# Altium PCB Relay_Mux_test.PcbDoc
Units mil, origin at the board's own origin, x right, y up, seen from the top; angles counter-clockwise.
Board outline 4325 x 2830 mil, 4 copper layers (Component Side, Ground Plane, Power Plane, Solder Side), stack 33.234 mil thick; 61 components, 93 nets, 292 pads, 8 vias.
Unrouted connection lines stored in the file: 98.
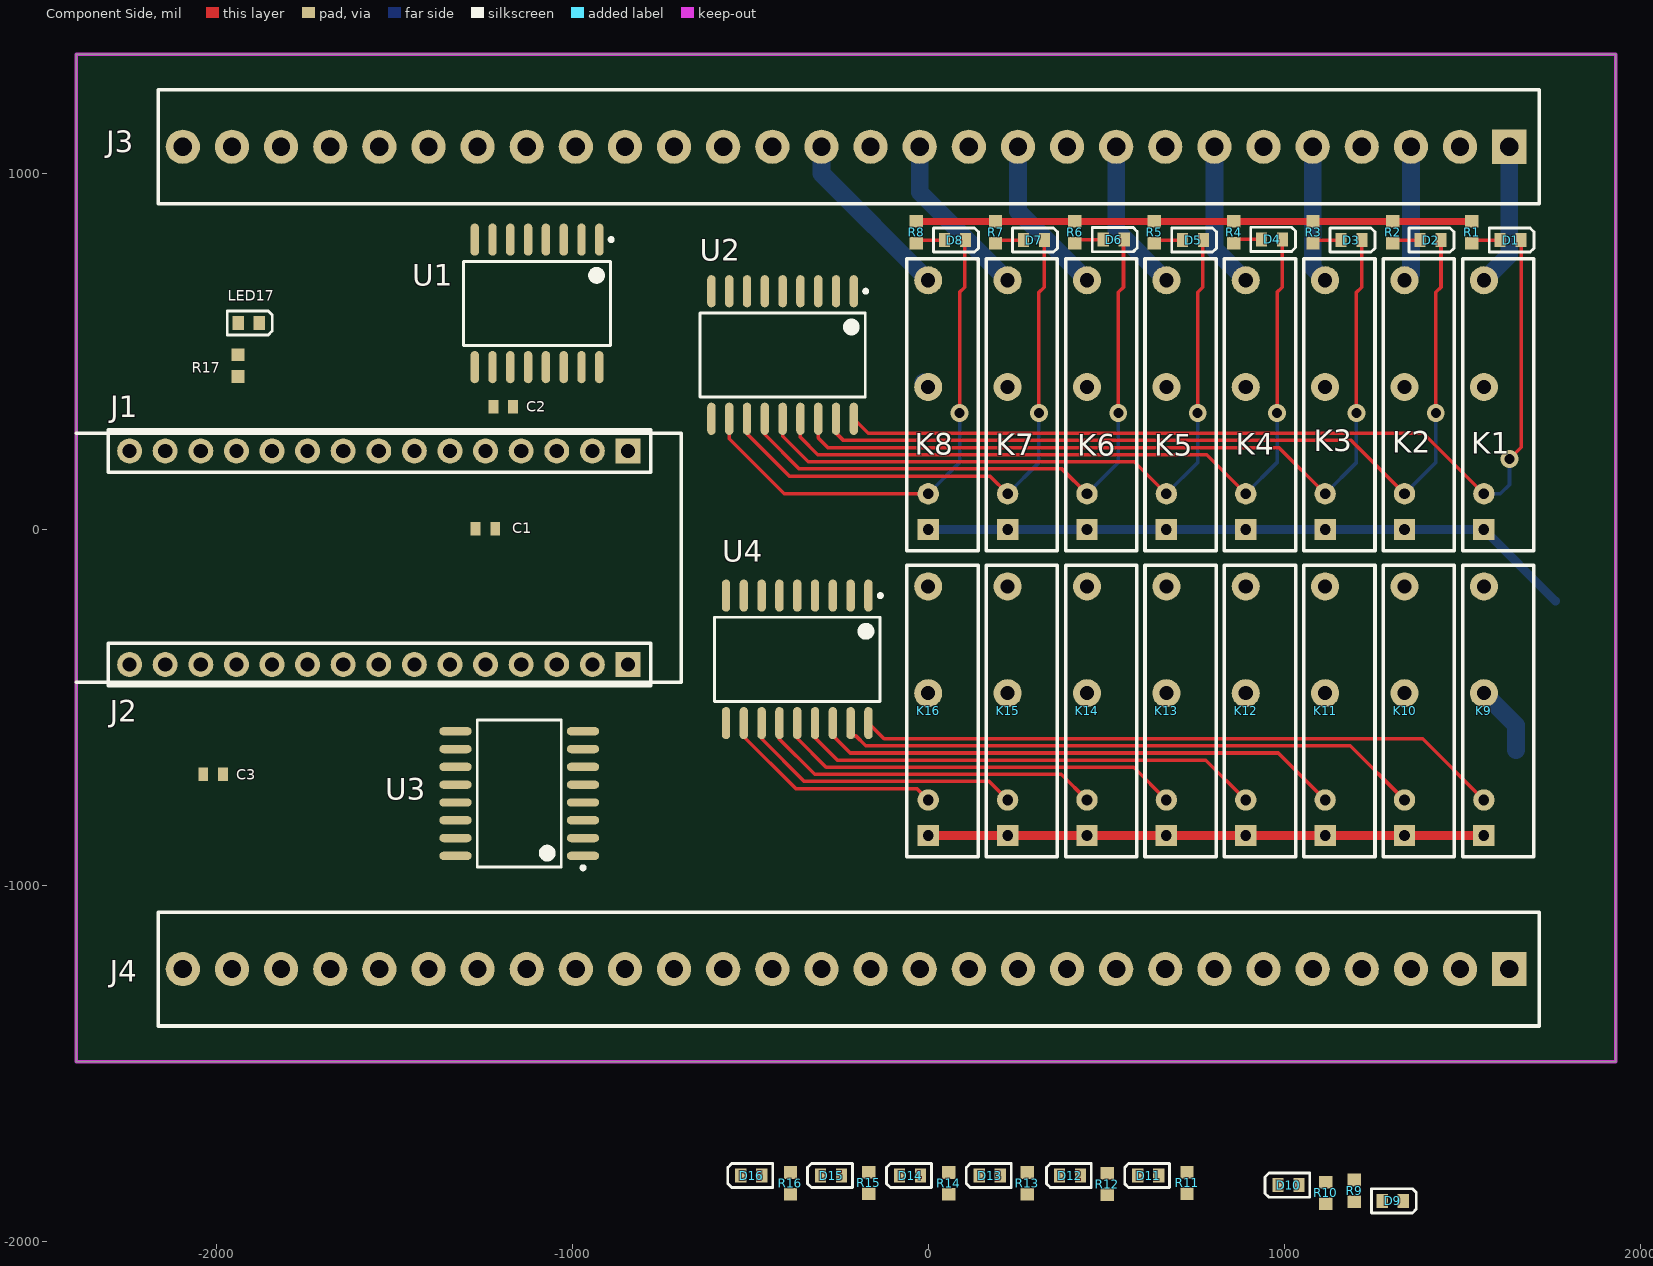
[diagram p0: Component Side view]
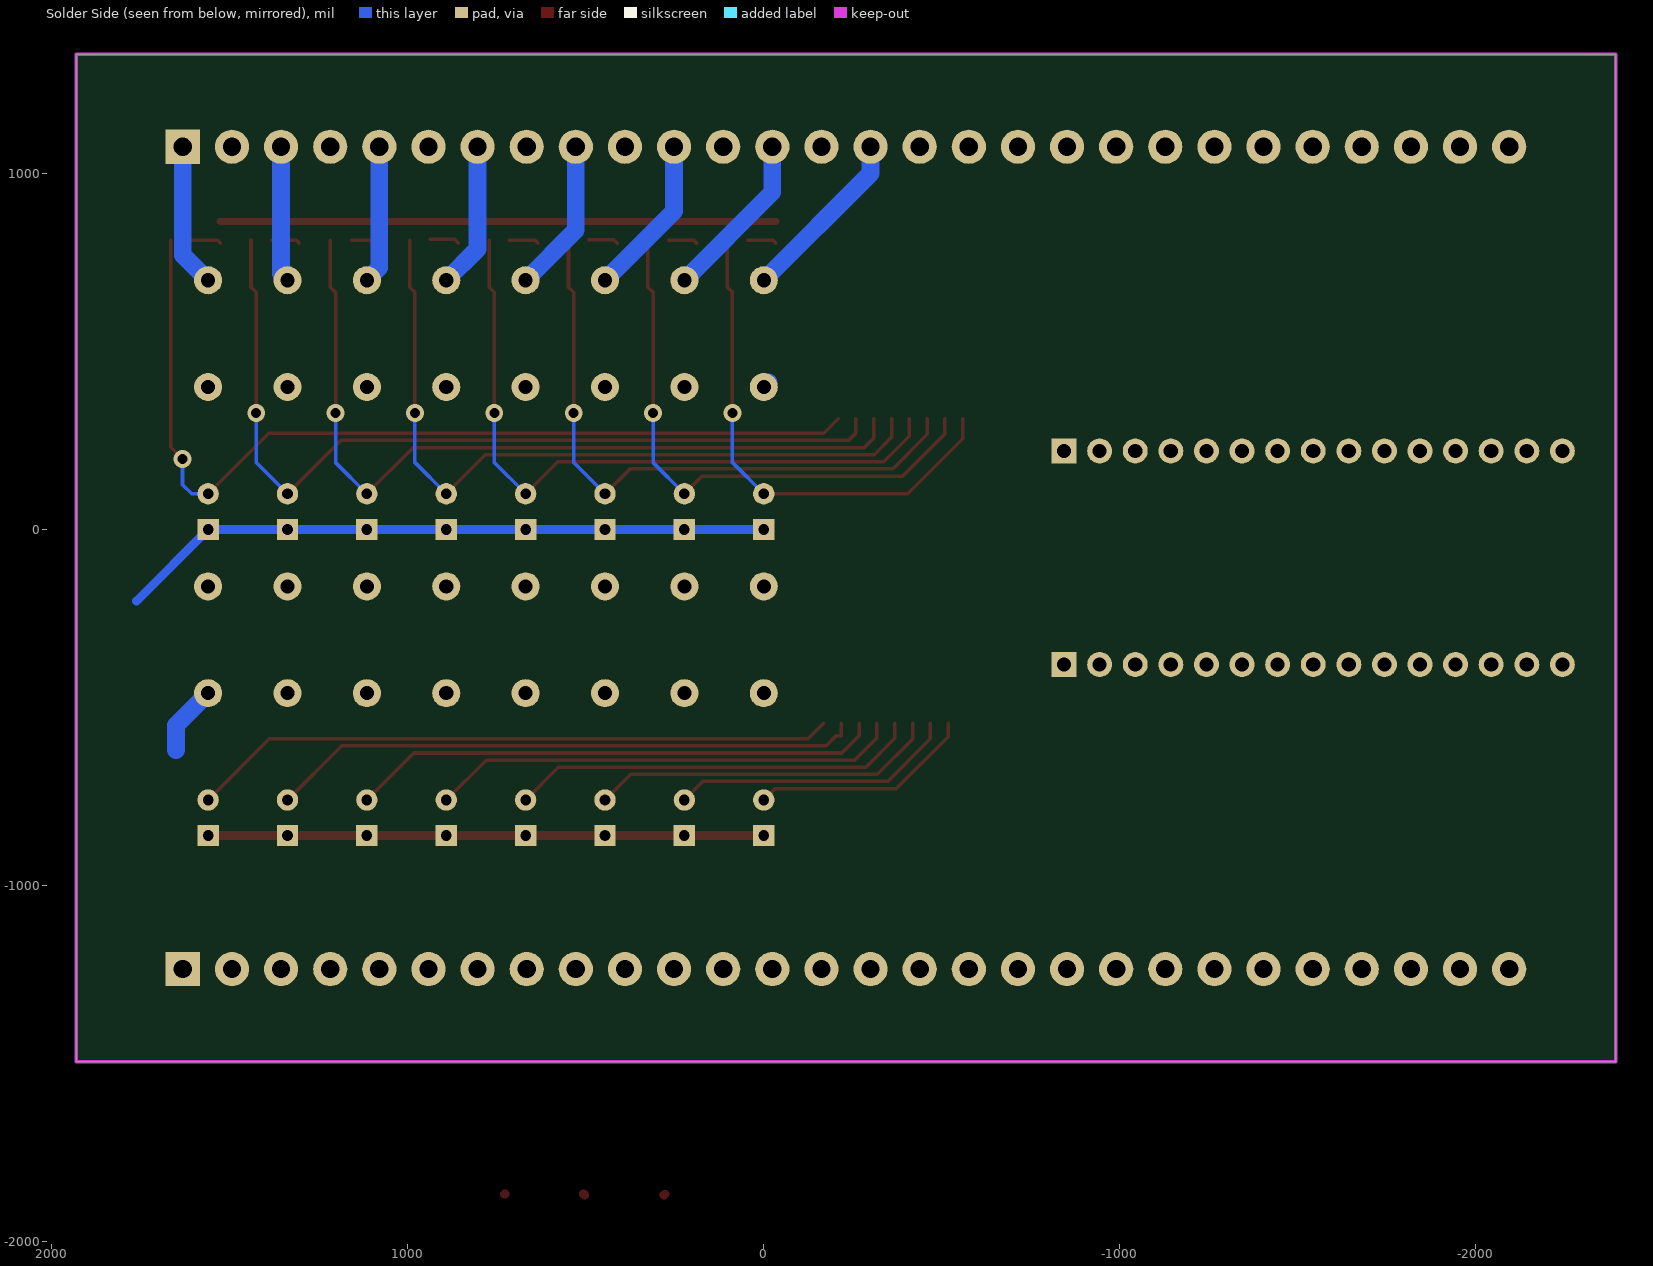
[diagram p1: Solder Side view, seen from below]
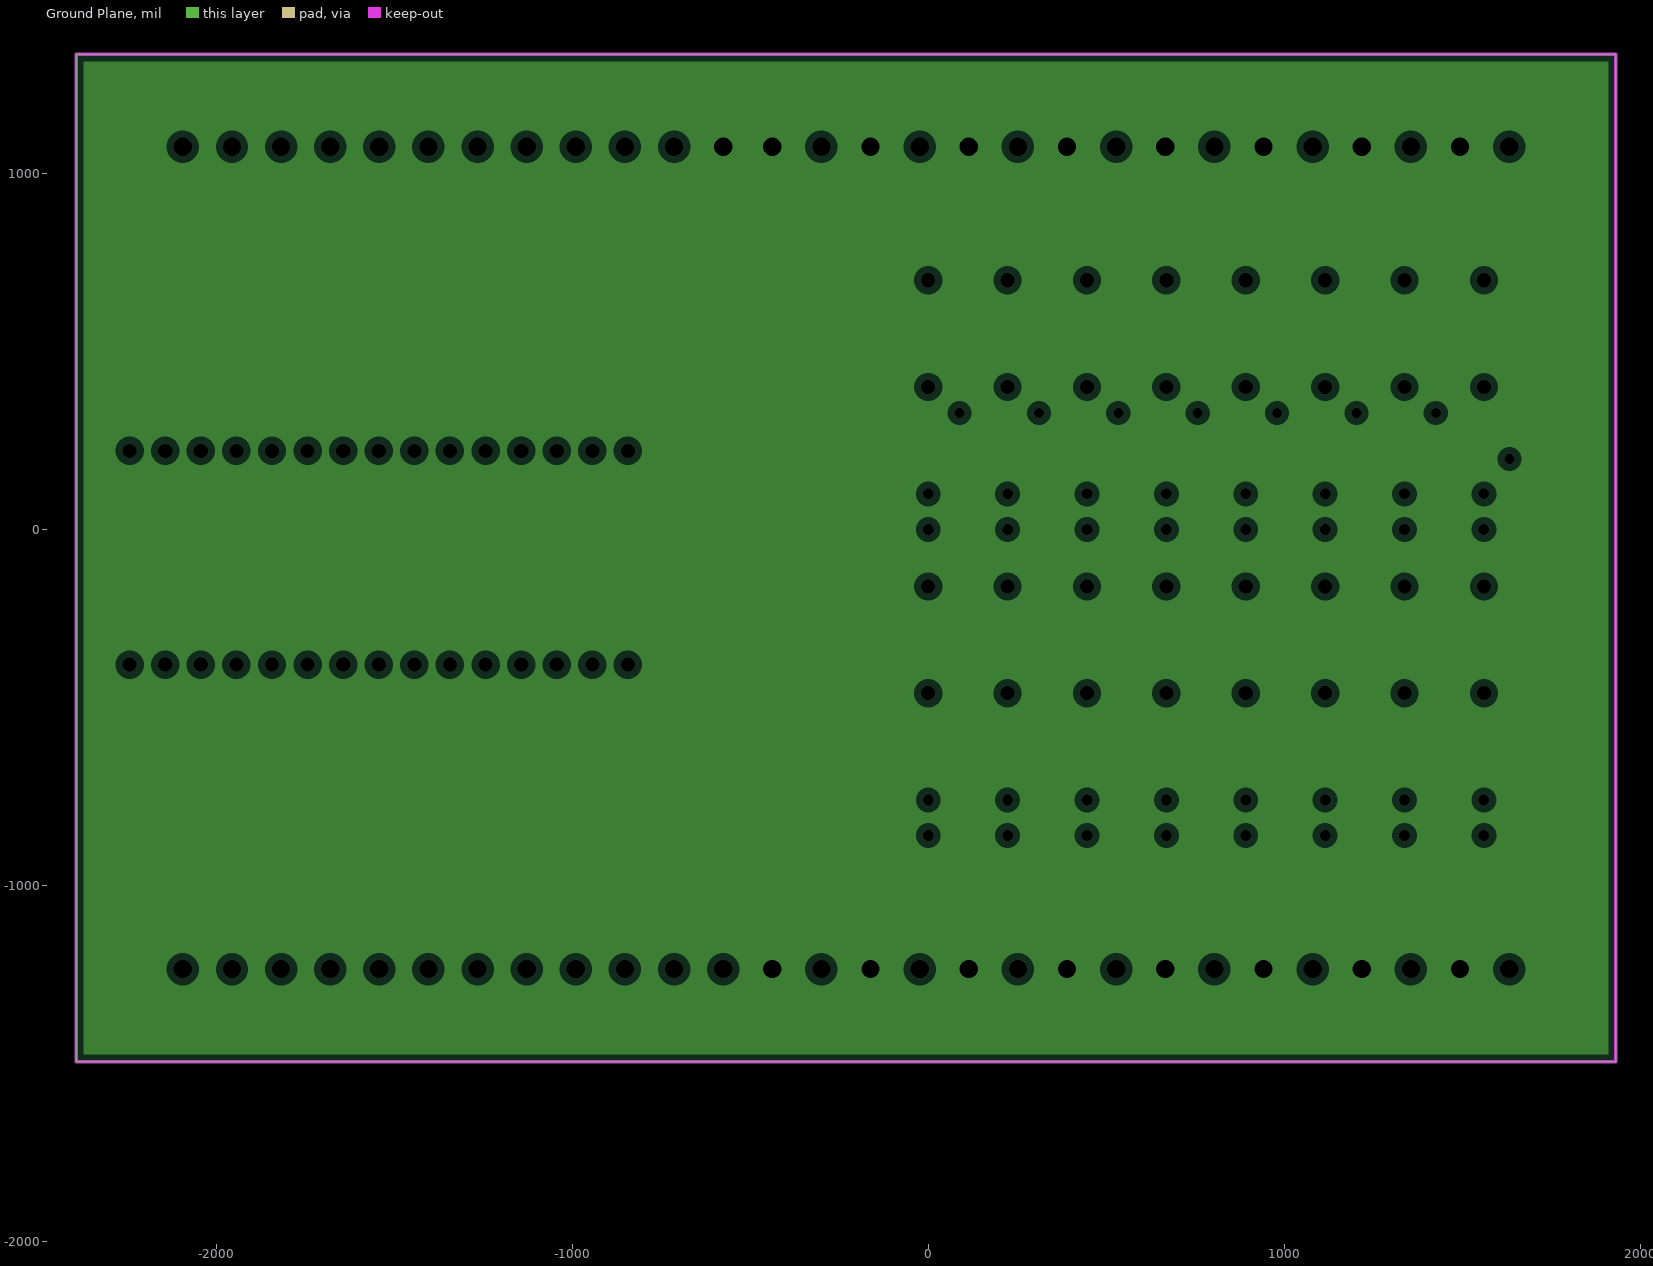
[diagram p2: Ground Plane, clearances drawn from the general rule]
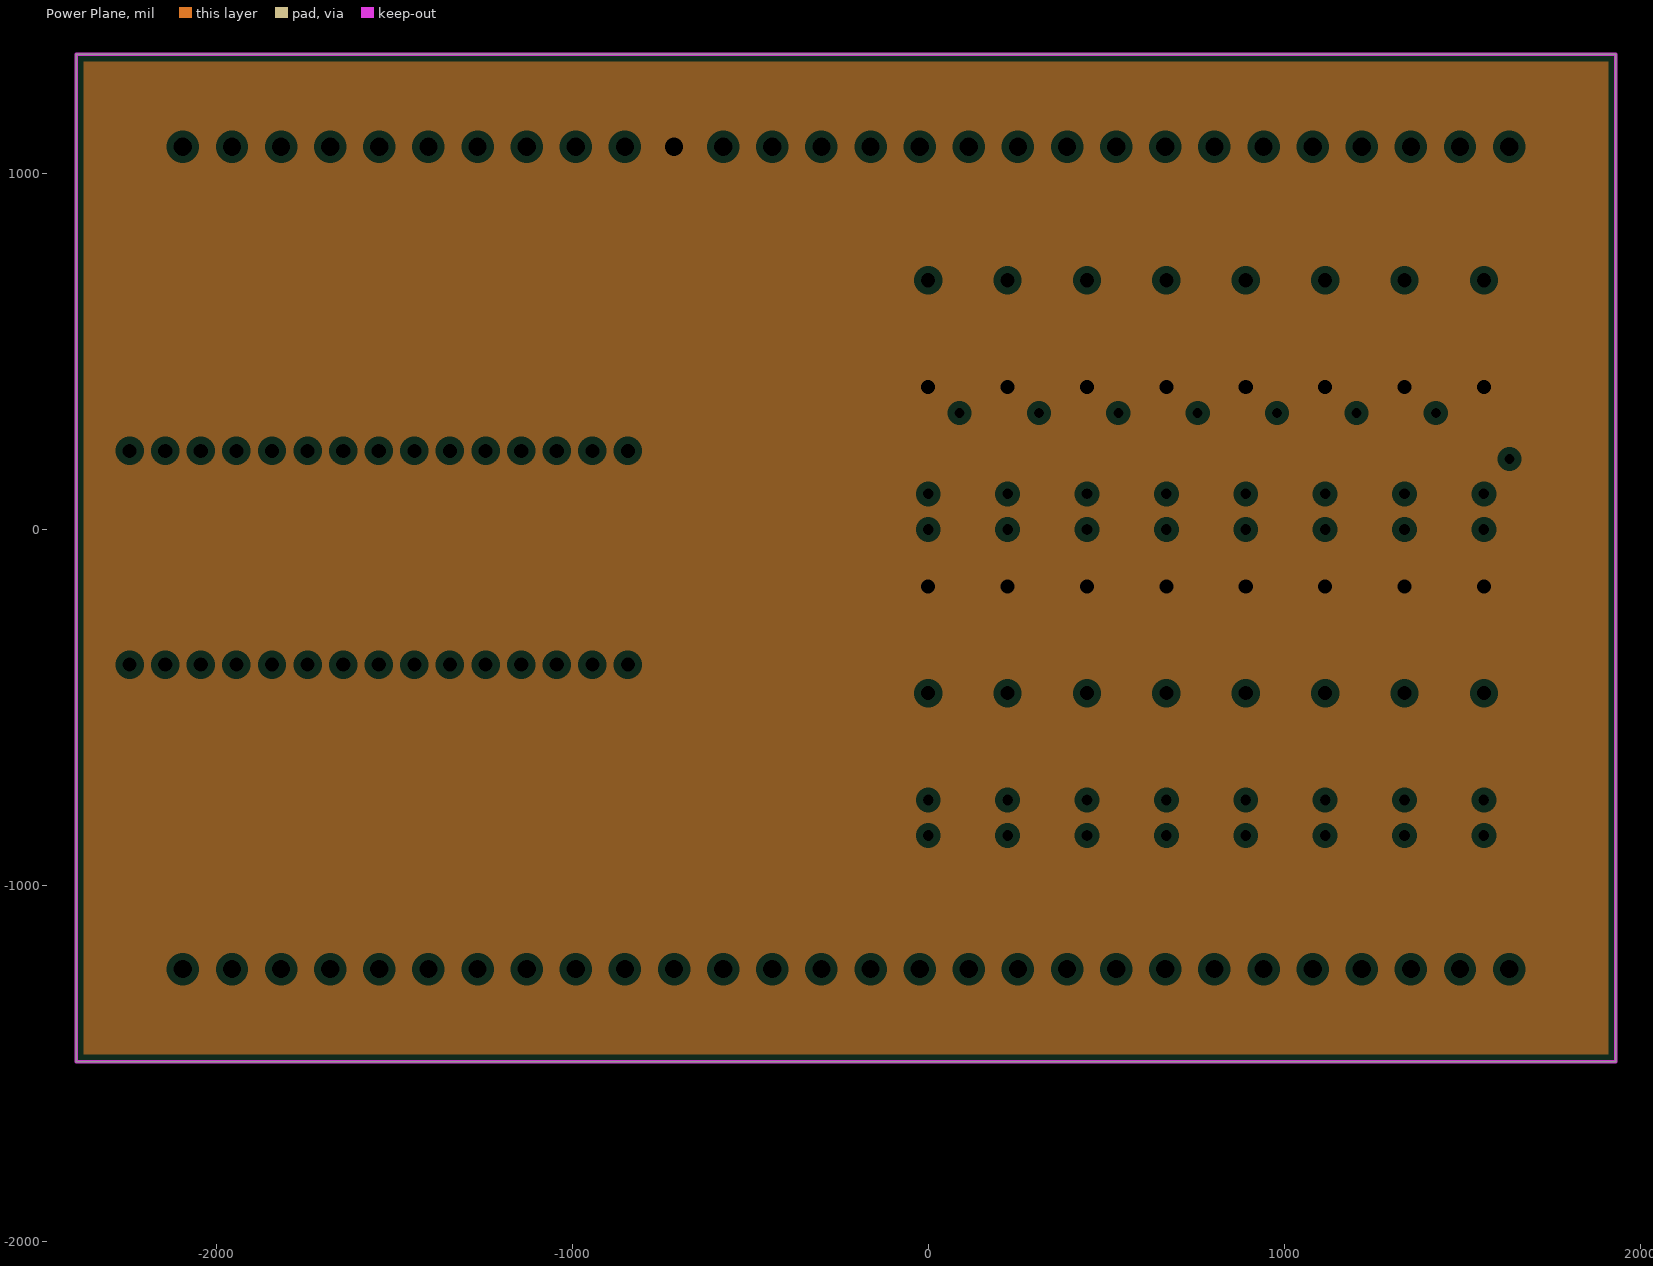
[diagram p3: Power Plane, clearances drawn from the general rule]

## Layer stack, top to bottom
Top Solder: solder mask 0.4, Solder Resist, Dk 3.5
Component Side: signal copper 1.4
Input: core 12.6, FR-4, Dk 4.8
Ground Plane: plane copper 1.417, net COM
Dielectric 3: prepreg 5, Dk 4.2
Power Plane: plane copper 1.417, net INPUT
Com: core 10, Dk 4.2
Solder Side: signal copper 1.4
Bottom Solder: solder mask 0.4, Solder Resist, Dk 3.5

## Board outline
-2393.5,-1495 -2393.5,1335 1931.5,1335 1931.5,-1495

## Design rules (kind name [scope] priority, off if disabled: settings)
Clearance [All] p1: gap=10
PlaneClearance [All] p1: clearance=20
PlaneConnect [All] p1: planeconnectstyle=Relief reliefexpansion=20 reliefentries=4 reliefconductorwidth=10 reliefairgap=10
PolygonConnect [All] p1: connectstyle=Relief reliefconductorwidth=10 reliefentries=4 polygonreliefangle="90 Angle" airgapwidth=10
RoutingVias [All] p1: holewidth=28 width=50 viastyle="Through Hole" minholewidth=28 minwidth=50 maxholewidth=28 maxwidth=50
SilkToSilkClearance [All] p1: silktosilkclearance=8
SolderMaskExpansion [All] p1: expansion=4
Width Width_Signal [InNet(OUT1)Or InNet(OUT2)Or InNet(OUT3)Or InNet(OUT4)Or InNet(OUT5)Or InNet(OUT6)Or InNet(OUT7)Or InNet(OUT8)Or InNet(OUT9)Or InNet(OUT10)Or InNet(OUT11)Or InNet(OUT12)Or InNet(OUT13)Or InNet(OUT14)Or InNet(OUT15)Or InNet(OUT16)Or InNet(Q0)Or InNet(Q1)Or InNet(Q2)Or InNet(Q3)Or InNet(Q4)Or InNet(Q5)Or InNet(Q6)Or InNet(Q7)Or InNet(Q8)Or InNet(Q9)Or InNet(Q10)Or InNet(Q11)Or InNet(Q12)Or InNet(Q13)Or InNet(Q14)Or InNet(Q15)] p1: maxlimit=10 minlimit=10 preferedwidth=10
Width Width_Pwr [InNet(GND)Or InNet(VCC)Or InNet(VIN)] p2: maxlimit=25 minlimit=20 preferedwidth=20
Width Width_Contacts [InNet(Input)Or InNet(Com)Or InNet(Ch1)Or InNet(Ch2)Or InNet(Ch3)Or InNet(Ch4)Or InNet(Ch5)Or InNet(Ch6)Or InNet(Ch7)Or InNet(Ch8)Or InNet(Ch9)Or InNet(Ch10)Or InNet(Ch11)Or InNet(Ch10)Or InNet(Ch11)Or InNet(Ch12)Or InNet(Ch13)Or InNet(Ch14)Or InNet(Ch15)Or InNet(Ch16)] p3: maxlimit=50 minlimit=50 preferedwidth=50
26 further rules are at their usual default settings.

## Components (designator, comment, footprint, x,y, rotation, side; value= is the part's Value field where it differs from the comment)
C1 "Cap" 0603_Capacitor -1244,2 r180 top
C2 "Cap" 0603_Capacitor -1194,345 r180 top
C3 "Cap" 0603_Capacitor -2009,-688 r180 top
D1 "LED3" LITE_ON_LED 1636,813 r0 top
D2 "LED3" LITE_ON_LED 1411,813 r0 top
D3 "LED3" LITE_ON_LED 1189,813 r0 top
D4 "LED3" LITE_ON_LED 966,815 r0 top
D5 "LED3" LITE_ON_LED 744,813 r0 top
D6 "LED3" LITE_ON_LED 521,814 r0 top
D7 "LED3" LITE_ON_LED 297,813 r0 top
D8 "LED3" LITE_ON_LED 75,813 r0 top
D9 "LED3" LITE_ON_LED 1305,-1886 r0 top
D10 "LED3" LITE_ON_LED 1012,-1842 r180 top
D11 "LED11" LITE_ON_LED 618,-1815 r180 top
D12 "LED3" LITE_ON_LED 398,-1815 r180 top
D13 "LED3" LITE_ON_LED 173,-1815 r180 top
D14 "LED3" LITE_ON_LED -51,-1815 r180 top
D15 "LED3" LITE_ON_LED -273,-1815 r180 top
D16 "LED3" LITE_ON_LED -497,-1815 r180 top
J1 "J1_Nano" "J1, J2 - Arduino Nano" -1543.5,220.5 r270 top
J2 "J2_Nano" "J1, J2 - Arduino Nano" -1543.5,-379.5 r270 top
J3 "J3" Term_Block_Amphenol_20020327 1632,1075 r270 top
J4 "J4" Term_Block_Amphenol_20020327 1632,-1235 r270 top
K1 "K*" "Relay_G6DN-1A DC5" 1561,700 r90 top
K2 "K*" "Relay_G6DN-1A DC5" 1338,700 r90 top
K3 "K*" "Relay_G6DN-1A DC5" 1115,700 r90 top
K4 "K*" "Relay_G6DN-1A DC5" 892,700 r90 top
K5 "K*" "Relay_G6DN-1A DC5" 669,700 r90 top
K6 "K*" "Relay_G6DN-1A DC5" 446,700 r90 top
K7 "K*" "Relay_G6DN-1A DC5" 223,700 r90 top
K8 "K*" "Relay_G6DN-1A DC5" 0,700 r90 top
K9 "K*" "Relay_G6DN-1A DC5" 1561,-160 r90 top
K10 "K*" "Relay_G6DN-1A DC5" 1338,-160 r90 top
K11 "K*" "Relay_G6DN-1A DC5" 1115,-160 r90 top
K12 "K*" "Relay_G6DN-1A DC5" 892,-160 r90 top
K13 "K*" "Relay_G6DN-1A DC5" 669,-160 r90 top
K14 "K*" "Relay_G6DN-1A DC5" 446,-160 r90 top
K15 "K*" "Relay_G6DN-1A DC5" 223,-160 r90 top
K16 "K*" "Relay_G6DN-1A DC5" 0,-160 r90 top
LED17 "LED3" LITE_ON_LED -1909,580 r0 top
R1 "Res3" 0603_Resistor 1527,835 r270 top
R2 "Res3" 0603_Resistor 1305,835 r270 top
R3 "Res3" 0603_Resistor 1081,835 r270 top
R4 "Res3" 0603_Resistor 858,835 r270 top
R5 "Res3" 0603_Resistor 635,835 r270 top
R6 "Res3" 0603_Resistor 412,835 r270 top
R7 "Res3" 0603_Resistor 189,835 r270 top
R8 "Res3" 0603_Resistor -34,835 r270 top
R9 "Res3" 0603_Resistor 1197,-1858 r270 top
R10 "Res3" 0603_Resistor 1117,-1864 r90 top
R11 "Res3" 0603_Resistor 727,-1836 r90 top
R12 "Res3" 0603_Resistor 503,-1839 r90 top
R13 "Res3" 0603_Resistor 278,-1837 r90 top
R14 "Res3" 0603_Resistor 58,-1837 r90 top
R15 "Res3" 0603_Resistor -167,-1836 r90 top
R16 "Res3" 0603_Resistor -387,-1837 r90 top
R17 "Res3" 0603_Resistor -1939,460 r90 top
U1 "74HC595" 16Pin_SOIC127P1030X265-16N -1099,635 r270 top
U2 "ULN2803" 18Pin_SOIC127P1030X265-18N -409,490 r270 top
U3 "74HC595" 16Pin_SOIC127P1030X265-16N -1149,-742 r180 top
U4 "ULN2803" 18Pin_SOIC127P1030X265-18N -368,-365 r270 top

## Footprints (in the part's own frame and the unit in brackets; to place one, negate y for a bottom-side part, rotate by r counter-clockwise, add the part's x,y. Pads: shape width x height; smd on the part's side, far side on the other; paste and mask are expansions set on the pad)
16Pin_SOIC127P1030X265-16N [mm] "SOIC, 16-Leads, Body 10.30x7.50mm, Pitch 1.27mm, IPC Medium Density"
  oval 2.3x0.6 smd: 1(-4.55,4.445) 2(-4.55,3.175) 3(-4.55,1.905) 4(-4.55,0.635) 5(-4.55,-0.635) 6(-4.55,-1.905) 7(-4.55,-3.175) 8(-4.55,-4.445) 9(4.55,-4.445) 10(4.55,-3.175) 11(4.55,-1.905) 12(4.55,-0.635) 13(4.55,0.635) 14(4.55,1.905) 15(4.55,3.175) 16(4.55,4.445)
  silkscreen extent -4.67,-5.25 3,5.42, body extent -3.8,-5.25 3.8,5.25, height 2.65
18Pin_SOIC127P1030X265-18N [mm] "SOIC, 18-Leads, Body 11.55x7.50mm, Pitch 1.27mm, IPC Medium Density"
  oval 2.3x0.6 smd: 1(-4.55,5.08) 2(-4.55,3.81) 3(-4.55,2.54) 4(-4.55,1.27) 5(-4.55,0) 6(-4.55,-1.27) 7(-4.55,-2.54) 8(-4.55,-3.81) 9(-4.55,-5.08) 10(4.55,-5.08) 11(4.55,-3.81) 12(4.55,-2.54) 13(4.55,-1.27) 14(4.55,0) 15(4.55,1.27) 16(4.55,2.54) 17(4.55,3.81) 18(4.55,5.08)
  silkscreen extent -4.67,-5.9 3,6.06, body extent -3.8,-5.9 3.8,5.9, height 2.65
0603_Capacitor [mm]
  rect 0.7x0.95 smd: 1(-0.7,0) 2(0.7,0)
  body extent -0.83,-0.43 0.82,0.43, height 0.6
0603_Resistor [mm]
  rect 0.9x0.95 smd: 1(-0.775,0) 2(0.775,0)
  body extent -0.87,-0.47 0.88,0.48, height 0.6
"J1, J2 - Arduino Nano" [mil]
  rect 70x70 hole 40: 1(0,700)
  round 70 hole 40: 2(0,600) 3(0,500) 4(0,400) 5(0,300) 6(0,200) 7(0,100) 8(0,0) 9(0,-100) 10(0,-200) 11(0,-300) 12(0,-400) 13(0,-500) 14(0,-600) 15(0,-700)
  silkscreen extent -60,-760 60,764
LITE_ON_LED [mm]
  rect 0.8x1 smd: 1(-0.75,0) 2(0.75,0)
  silkscreen extent -1.52,-0.86 1.68,0.86
"Relay_G6DN-1A DC5" [mil]
  rect 60x60 hole 30: 1(-700,0)
  round 60 hole 30: 2(-600,0)
  round 78.74 hole 39.37: 5(-300,0) 8(0,0)
  silkscreen extent -760,-140 60,60
Term_Block_Amphenol_20020327 [mil] "24 pos, 3.81 mm pitch, screw term"
  rect 96x96 hole 51: 1(0,0)
  round 96 hole 51: 2(0,-138) 3(0,-276) 4(0,-414) 5(0,-552) 6(0,-690) 7(0,-828) 8(0,-966) 9(0,-1104) 10(0,-1242) 11(0,-1380) 12(0,-1518) 13(0,-1656) 14(0,-1794) 15(0,-1932) 16(0,-2070) 17(0,-2208) 18(0,-2346) 19(0,-2484) 20(0,-2622) 21(0,-2760) 22(0,-2898) 23(0,-3036) 24(0,-3174) 25(0,-3312) 26(0,-3450) 27(0,-3588) 28(0,-3726)
  silkscreen extent -160,-3795 160,84

## Part data
C1 C2 C3: "Capacitor"
D1 D2 D3 D4 D5 D6 D7 D8 D9 D10 D12 D13 D14 D15 D16 LED17: "Typical BLUE SiC LED"
D11: library part LED3, "Typical BLUE SiC LED"
J1: library part J1, "J1 on Arduino Nano"
J2: library part J2, "J2 on Arduino Nano"
K1 K2 K3 K4 K5 K6 K7 K8 K9 K10 K11 K12 K13 K14 K15 K16: library part "Relay_G6DN-1A DC5", "Relay, SPST, 5V"
R1 R2 R3 R4 R5 R6 R7 R8 R9 R10 R11 R12 R13 R14 R15 R16 R17: "Resistor"

## Via types
v1: diameter 50, hole 28, Component Side to Solder Side, 8 vias

## Nets (pads, with @x,y where several pads share a name; then routed paths per layer and width w, separated by ;. In a path a pad name is that pad's centre, name@x,y a point inside that pad or via, vN(x,y) a via of type N, cw(c..) or ccw(c..) an arc to the next point about the centre after c; other vN are vias at no path point)
3V3: J2.14 J4.28
A0: J4.26
A1: J2.11 J2.12 J4.25
A2: J2.10 J4.24
A3: J2.9 J4.23
A4: J2.8 J4.22
AREF: J2.13 J4.27
CH1: J3.1 K1.8 | length 404.4
  Solder Side w50: K1.8 1632,771 J3.1
CH2: J3.3 K2.8 | length 357
  Solder Side w50: K2.8@1356,718 J3.3
CH3: J3.5 K3.8 | length 389.5
  Solder Side w50: J3.5 1080,735 K3.8
CH4: J3.7 K4.8 | length 411.5
  Solder Side w50: J3.7 804,788 K4.8
CH5: J3.9 K5.8 | length 433.4
  Solder Side w50: J3.9 528,841 K5.8
CH6: J3.11 K6.8 | length 455.4
  Solder Side w50: J3.11 252,894 K6.8
CH7: J3.13 K7.8 | length 477.3
  Solder Side w50: J3.13 -24,947 K7.8
CH8: J3.15 K8.8 | length 499.3
  Solder Side w50: J3.15 -300,1000 K8.8
CH9: J4.1 K9.5 | length 197.3
  Solder Side w50: K9.5 1651,-550 1651,-620
CH10: J4.3 K10.5 | length 22
  Solder Side w50: J4.3 J4.3@1356,-1213
CH11: J4.5 K11.5
CH12: J4.7 K12.5
CH13: J4.9 K13.5
CH14: J4.11 K14.5
CH15: J4.13 K15.5
CH16: J4.15 K16.5
COM: J3.2 J3.4 J3.6 J3.8 J3.10 J3.12 J3.14 J3.16 J3.17 J4.2 J4.4 J4.6 J4.8 J4.10 J4.12 J4.14 J4.16
D0: J1.2 J3.19
D1: J1.1 J3.20
D2: J1.5 J3.21
D4: J1.7 J3.22
D5: J1.10
D7: J3.23
D8: J1.11 J3.24
D9: J1.12 R17.1
D10: J1.13 J3.25
D11: J1.14 J3.26
D12: J1.15 J3.27
D13: J2.15 J3.28
DS: J1.8 U1.14
GND: C1.1 C2.1 C3.1 J1.4 J2.2 J4.18 J4.19 J4.20 LED17.2 U1.8 U1.13 U2.9 U3.8 U3.13 U4.9
INPUT: J3.18 K1.5 K2.5 K3.5 K4.5 K5.5 K6.5 K7.5 K8.5 K9.8 K10.8 K11.8 K12.8 K13.8 K14.8 K15.8 K16.8 | length 18.4
  Solder Side w50: K8.5@-13,413 K8.5
NetD1_1: D1.1 R1.2 | length 83
  Component Side w10: R1.2 1535.52,813 D1.1
NetD2_1: D2.1 R2.2 | length 80
  Component Side w10: R2.2 1313.52,813 D2.1
NetD3_1: D3.1 R3.2 | length 82
  Component Side w10: R3.2 1089.52,813 D3.1
NetD4_1: D4.1 R4.2 | length 82.8
  Component Side w10: R4.2 868.52,815 D4.1
NetD5_1: D5.1 R5.2 | length 83
  Component Side w10: R5.2 643.52,813 D5.1
NetD6_1: D6.1 R6.2 | length 83.4
  Component Side w10: R6.2 421.52,814 D6.1
NetD7_1: D7.1 R7.2 | length 82
  Component Side w10: R7.2 197.52,813 D7.1
NetD8_1: D8.1 R8.2 | length 83
  Component Side w10: R8.2 -25.48,813 D8.1
NetD9_1: D9.1 R9.2
NetD10_1: D10.1 R10.2
NetD11_1: D11.1 R11.2
NetD12_1: D12.1 R12.2
NetD13_1: D13.1 R13.2
NetD14_1: D14.1 R14.2
NetD15_1: D15.1 R15.2
NetD16_1: D16.1 R16.2
NetLED17_1: LED17.1 R17.2
NetU1_9: U1.9 U3.14
OUT1: D1.2 K1.2 U2.18 | length 2640.6
  Component Side w10: U2.18 -168.13,270 1391,270 K1.2 ; v1(1633,198) 1665.53,230.53 D1.2
  Solder Side w10: K1.2 1607,100 1633,126 v1(1633,198)
OUT2: D2.2 K2.2 U2.17 | length 2463.2
  Component Side w10: U2.17 -259,271 -238,250 1188,250 K2.2 ; v1(1426,327) 1426,666 1440.53,680.53 D2.2
  Solder Side w10: K2.2 1426,188 v1(1426,327)
OUT3: D3.2 K3.2 U2.16 | length 2298.4
  Component Side w10: U2.16 -309,257 -282,230 985,230 K3.2 ; v1(1203,327) 1203,666 1217.53,680.53 D3.2@1217.53,813
  Solder Side w10: K3.2 1203,188 v1(1203,327)
OUT4: D4.2 K4.2 U2.15 | length 2124.2
  Component Side w10: U2.15 -359,259 -310,210 782,210 K4.2 ; v1(980,327) 980,666 994.53,680.53 D4.2@994.53,813
  Solder Side w10: K4.2 980,188 v1(980,327)
OUT5: D5.2 K5.2 U2.14 | length 1949.4
  Component Side w10: U2.14 -409,262 -337,190 579,190 K5.2 ; v1(757,327) 757,666 771.53,680.53 D5.2@771.53,813
  Solder Side w10: K5.2 757,188 v1(757,327)
OUT6: D6.2 K6.2 U2.13 | length 1773.5
  Component Side w10: U2.13 -459,267 -362,170 376,170 K6.2 ; v1(534,327) 534,666 548.53,680.53 D6.2@548.53,813
  Solder Side w10: K6.2 534,188 v1(534,327)
OUT7: D7.2 K7.2 U2.12 | length 1599.3
  Component Side w10: U2.12 -509,269 -390,150 173,150 K7.2 ; v1(311,327) 311,666 325.53,680.53 D7.2@325.53,813
  Solder Side w10: K7.2 311,188 v1(311,327)
OUT8: D8.2 K8.2 U2.11 | length 1435.3
  Component Side w10: U2.11 -559,255 -404,100 K8.2 ; v1(88,327) 88,666 102.53,680.53 D8.2@102.53,813 ; D8.2@104,812.47 D8.2
  Solder Side w10: K8.2 88,188 v1(88,327)
OUT9: D9.2 K9.2 U4.18 | length 1818.4
  Component Side w10: U4.18 -124.13,-588 1389,-588 K9.2
OUT10: D10.2 K10.2 U4.17 | length 1665.8
  Component Side w10: U4.17 -218,-579 -204.51,-579 -175.51,-608 1186,-608 K10.2
OUT11: D11.2 K11.2 U4.16 | length 1492.8
  Component Side w10: U4.16 -268,-579 -219,-628 983,-628 K11.2
OUT12: D12.2 K12.2 U4.15 | length 1323.4
  Component Side w10: U4.15 -318,-585 -255,-648 780,-648 K12.2
OUT13: D13.2 K13.2 U4.14 | length 1151.5
  Component Side w10: U4.14 -368,-587 -287,-668 577,-668 K13.2
OUT14: D14.2 K14.2 U4.13 | length 979.7
  Component Side w10: U4.13 -418,-589 -319,-688 374,-688 K14.2
OUT15: D15.2 K15.2 U4.12 | length 806.1
  Component Side w10: U4.12 -468,-588 -348,-708 171,-708 K15.2
OUT16: D16.2 K16.2 U4.11 | length 629.6
  Component Side w10: U4.11 -518,-582 -372,-728 -32,-728 K16.2
Q0: U1.15 U2.1
Q1: U1.1 U2.2
Q2: U1.2 U2.3
Q3: U1.3 U2.4
Q4: U1.4 U2.5
Q5: U1.5 U2.6
Q6: U1.6 U2.7
Q7: U1.7 U2.8
Q8: U3.15 U4.1
Q9: U3.1 U4.2
Q10: U3.2 U4.3
Q11: U3.3 U4.4
Q12: U3.4 U4.5
Q13: U3.5 U4.6
Q14: U3.6 U4.7
Q15: U3.7 U4.8
SH_CP: J1.9 U1.11 U3.11
ST_CP: C1.2 J1.6 U1.12 U3.12
VCC: C2.2 C3.2 J2.4 J4.21 K1.1 K2.1 K3.1 K4.1 K5.1 K6.1 K7.1 K8.1 K9.1 K10.1 K11.1 K12.1 K13.1 K14.1 K15.1 K16.1 R1.1 R2.1 R3.1 R4.1 R5.1 R6.1 R7.1 R8.1 R9.1 R10.1 R11.1 R12.1 R13.1 R14.1 R15.1 R16.1 U1.10 U1.16 U3.10 U3.16 | length 4977.2
  Component Side w20: R8.1 R7.1 R6.1 R5.1 R4.1 R3.1 R2.1 R1.1
  Component Side w25: K16.1 K15.1 K14.1 K13.1 K12.1 K11.1 K10.1 K9.1 ; R13.1 R13.1@280,-1869.51 ; R12.1 R12.1@506,-1866.51 ; R11.1 R11.1@728,-1867.51
  Solder Side w25: K8.1@-1,-1 K8.1 K7.1 K6.1 K5.1 K4.1 K3.1 K2.1 K1.1 1762,-201
VIN: J2.1 J4.17
pads on no net: J1.3 J2.3 J2.5 J2.6 J2.7 U2.10 U3.9 U4.10

## Polygon pours and split planes (outlines as drawn)
COM on Ground Plane (split plane): 1911.4,-1474.9 -2373.4,-1474.9 -2373.4,1314.9 1911.4,1314.9
INPUT on Power Plane (split plane): 1911.4,-1474.9 -2373.4,-1474.9 -2373.4,1314.9 1911.4,1314.9

## Keep-outs
Keep-Out Layer:
  the board outline again, w10

## Silkscreen, mask and mechanical layers (free items; w line width, h text height)
Top Overlay:
  lines w10: -2393.5,-429.5 -693.5,-429.5 -693.5,270.5 -2393.5,270.5
Mechanical 1:
  lines w0.5: -2393.5,-429.5 -2393.5,270.5 ; -2393.5,-1495 1931.5,-1495 1931.5,1335 -2393.5,1335 -2393.5,-1495